# Altium PCB SNA.PcbDoc (part 3 of 6)
Units mm, origin at the board's own origin, x right, y up, seen from the top; angles counter-clockwise.
Board outline 122 x 98 mm, 4 copper layers (L1 Top Layer, L2 Inner 1, L3 Inner 2, L4 Bottom Layer), stack 1.588 mm thick; 466 components, 299 nets, 1366 pads, 4218 vias.
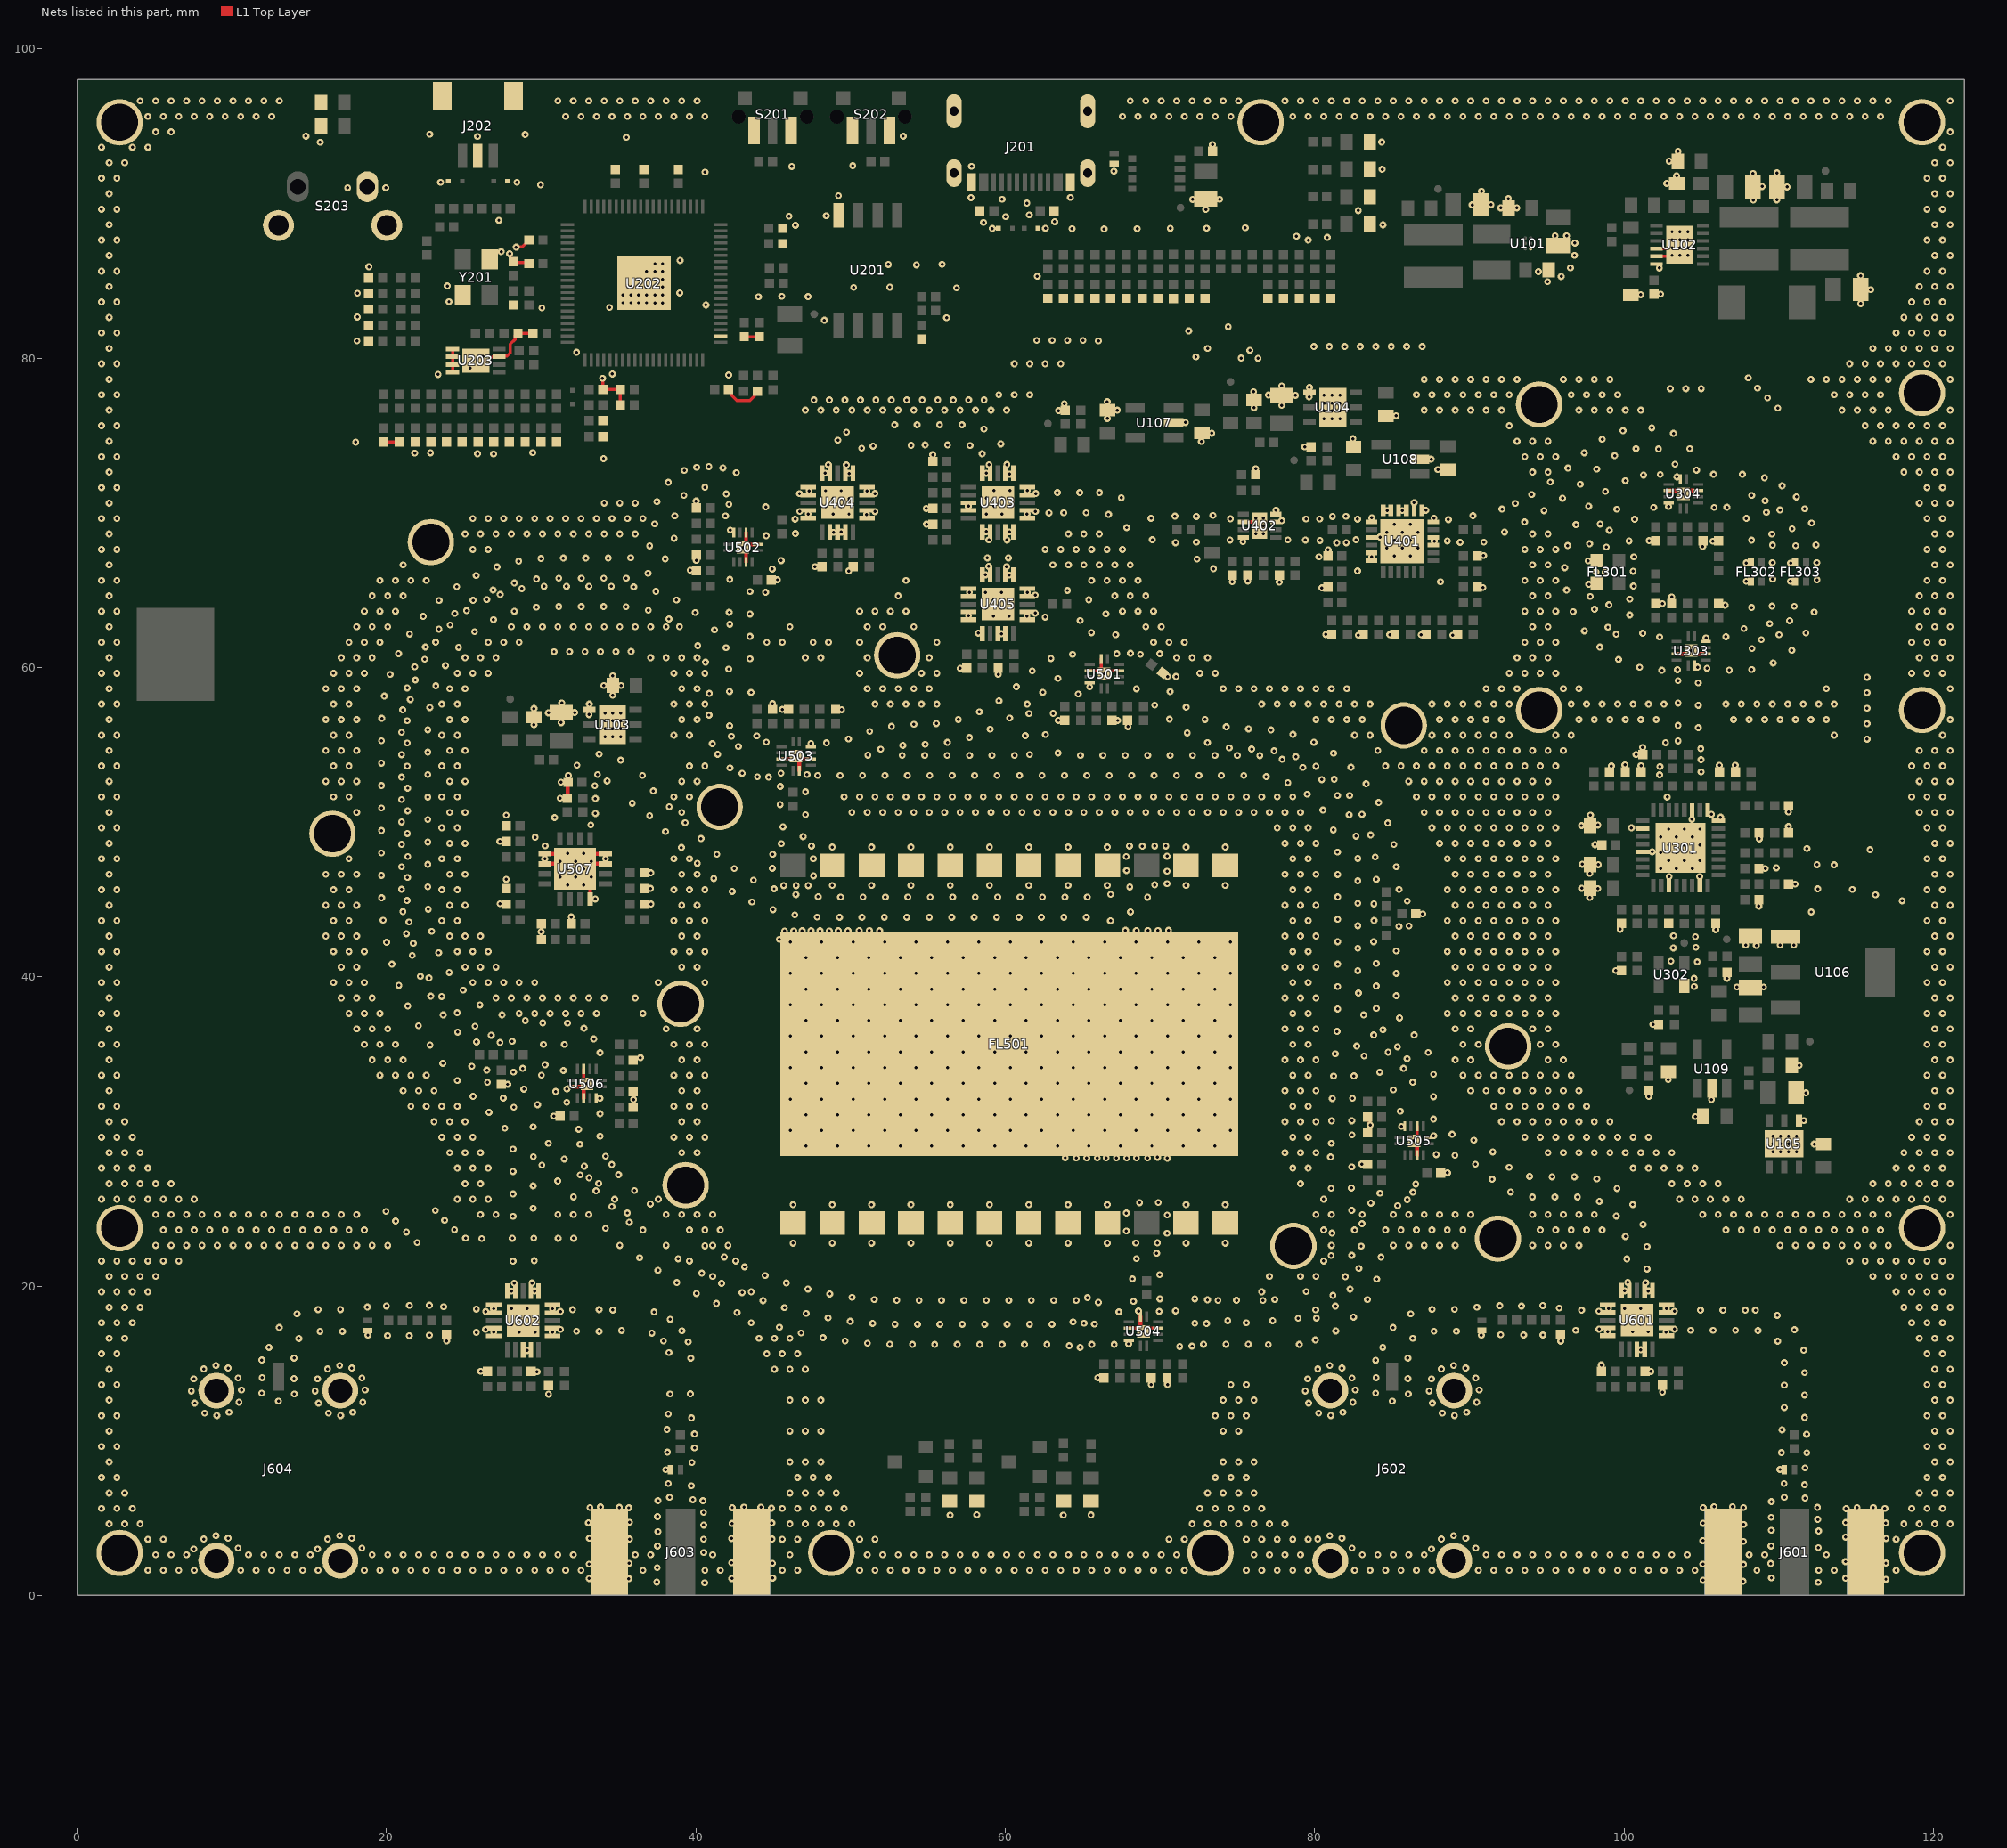
[diagram p5: the nets of this part, all layers, seen from the top]

## Via types
v1: diameter 0.45, hole 0.2, L1 Top Layer to L4 Bottom Layer, tented both sides, 4218 vias

## Nets (pads, with @x,y where several pads share a name; then routed paths per layer and width w, separated by ;. In a path a pad name is that pad's centre, name@x,y a point inside that pad or via, vN(x,y) a via of type N, cw(c..) or ccw(c..) an arc to the next point about the centre after c; other vN are vias at no path point) (continued)
GND: (continued)
  other v1: 40.55,0.82 112.538,0.847 37.467,0.866 107.687,0.914 105.095,0.98 116.91,1.034 33.094,1.093 35.664,1.081 42.32,1.093 114.308,1.114 44.959,1.12 109.512,1.134 4.572,1.625 5.572,1.625 6.572,1.625 7.572,1.625 10.572,1.625 11.572,1.625 12.572,1.625 13.572,1.625 14.572,1.625 15.572,1.625 18.572,1.625 19.572,1.625 20.572,1.625 21.572,1.625 22.572,1.625 23.572,1.625 24.572,1.625 25.572,1.625 26.572,1.625 27.572,1.625 28.572,1.625 29.572,1.625 30.572,1.625 31.572,1.625 32.572,1.625 36.572,1.625 40.572,1.625 41.572,1.625 45.572,1.625 46.572,1.625 50.572,1.625 51.572,1.625 52.572,1.625 53.572,1.625 54.572,1.625 55.572,1.625 56.572,1.625 57.572,1.625 58.572,1.625 59.572,1.625 60.572,1.625 61.572,1.625 62.572,1.625 63.572,1.625 64.572,1.625 65.572,1.625 66.572,1.625 67.572,1.625 68.572,1.625 69.572,1.625 70.572,1.625 71.572,1.625 75.572,1.625 76.572,1.625 77.572,1.625 78.572,1.625 79.572,1.625 82.572,1.625 83.572,1.625 84.572,1.625 85.572,1.625 86.572,1.625 87.572,1.625 90.572,1.625 91.572,1.625 92.572,1.625 93.572,1.625 94.572,1.625 95.572,1.625 96.572,1.625 97.572,1.625 98.572,1.625 99.572,1.625 100.572,1.625 101.572,1.625 102.572,1.625 103.572,1.625 104.572,1.625 108.572,1.625 112.572,1.625 113.572,1.625 117.572,1.625 37.494,1.793 107.713,2.007 33.083,2.027 105.078,2.025 35.67,2.075 44.941,2.074 109.464,2.061 116.91,2.091 42.31,2.112 114.296,2.183 5.072,2.625 6.072,2.625 7.072,2.625 11.072,2.625 12.072,2.625 13.072,2.625 14.072,2.625 15.072,2.625 19.072,2.625 20.072,2.625 21.072,2.625 22.072,2.625 23.072,2.625 24.072,2.625 25.072,2.625 26.072,2.625 27.072,2.625 28.072,2.625 29.072,2.625 30.072,2.625 31.072,2.625 32.072,2.625 36.072,2.625 37.072,2.625 41.072,2.625 46.072,2.625 51.072,2.625 52.072,2.625 53.072,2.625 54.072,2.625 55.072,2.625 56.072,2.625 57.072,2.625 58.072,2.625 59.072,2.625 60.072,2.625 61.072,2.625 62.072,2.625 63.072,2.625 64.072,2.625 65.072,2.625 66.072,2.625 67.072,2.625 68.072,2.625 69.072,2.625 70.072,2.625 71.072,2.625 76.072,2.625 77.072,2.625 78.072,2.625 79.072,2.625 83.072,2.625 84.072,2.625 85.072,2.625 86.072,2.625 87.072,2.625 91.072,2.625 92.072,2.625 93.072,2.625 94.072,2.625 95.072,2.625 96.072,2.625 97.072,2.625 98.072,2.625 99.072,2.625 100.072,2.625 101.072,2.625 102.072,2.625 103.072,2.625 104.072,2.625 108.072,2.625 109.072,2.625 113.072,2.625 40.495,2.775 7.541,3.003 15.541,3.003 87.541,3.003 10.401,3.062 18.401,3.062 82.401,3.062 90.401,3.062 112.545,3.094 37.513,3.197 109.491,3.199 107.703,3.494 105.084,3.538 4.572,3.625 5.572,3.625 45.572,3.625 46.572,3.625 50.572,3.625 51.572,3.625 70.572,3.625 71.572,3.625 75.572,3.625 76.572,3.625 77.572,3.625 78.572,3.625 79.572,3.625 117.572,3.625 8.185,3.648 16.185,3.648 35.699,3.646 40.486,3.638 44.923,3.645 80.185,3.648 88.185,3.648 9.756,3.706 17.756,3.706 33.105,3.692 42.305,3.689 81.756,3.706 89.756,3.706 116.912,3.686 114.307,3.773 8.968,3.865 16.968,3.865 80.968,3.865 88.968,3.865 37.54,4.124 112.563,4.164 109.505,4.208 40.495,4.546 107.725,4.588 2.072,4.625 3.072,4.625 4.072,4.625 46.072,4.625 47.072,4.625 48.072,4.625 49.072,4.625 50.072,4.625 72.072,4.625 73.072,4.625 74.072,4.625 75.072,4.625 76.072,4.625 77.072,4.625 78.072,4.625 118.072,4.625 119.072,4.625 120.072,4.625 121.072,4.625 42.325,4.654 105.09,4.665 33.045,4.691 44.904,4.684 116.898,4.682 114.313,4.709 35.699,4.73 112.511,4.916 109.498,5.046 37.513,5.097 56.43,5.196 63.738,5.19 65.531,5.203 58.153,5.212 40.486,5.363 114.34,5.611 1.572,5.625 2.572,5.625 3.572,5.625 45.572,5.625 46.572,5.625 47.572,5.625 48.572,5.625 49.572,5.625 72.572,5.625 73.572,5.625 74.572,5.625 75.572,5.625 76.572,5.625 116.845,5.624 118.572,5.625 119.572,5.625 120.572,5.625 44.878,5.646 33.148,5.678 35.658,5.667 42.344,5.673 105.101,5.671 107.714,5.682 112.489,5.69 115.054,5.678 116.104,5.678 35.049,5.695 43.101,5.707 44.194,5.701 33.825,5.717 105.802,5.732 106.996,5.732 109.512,6.062 37.54,6.125 40.45,6.125 39.798,6.193 111.686,6.295 38.29,6.342 110.349,6.349 2.072,6.625 3.072,6.625 46.072,6.625 47.072,6.625 48.072,6.625 49.072,6.625 73.072,6.625 74.072,6.625 75.072,6.625 76.072,6.625 119.072,6.625 120.072,6.625 121.072,6.625 39.704,7.096 111.652,7.163 38.21,7.235 110.329,7.238 1.572,7.625 2.572,7.625 46.572,7.625 47.572,7.625 48.572,7.625 73.572,7.625 74.572,7.625 75.572,7.625 119.572,7.625 120.572,7.625 38.039,8.128 110.062,8.143 111.689,8.239 39.742,8.586 2.072,8.625 46.072,8.625 47.072,8.625 48.072,8.625 74.072,8.625 75.072,8.625 76.072,8.625 120.072,8.625 121.072,8.625 111.797,9.221 110.161,9.228 38.155,9.263 39.898,9.541 1.572,9.625 2.572,9.625 119.572,9.625 120.572,9.625 111.791,10.42 39.898,10.444 2.072,10.625 46.072,10.625 47.072,10.625 48.072,10.625 74.072,10.625 75.072,10.625 120.072,10.625 121.072,10.625 110.193,10.714 38.126,10.732 39.71,11.479 111.652,11.508 1.572,11.625 2.572,11.625 9.032,11.629 17.032,11.629 73.572,11.625 74.572,11.625 75.572,11.625 81.032,11.629 89.032,11.629 119.572,11.625 120.572,11.625 38.214,11.725 8.244,11.788 16.244,11.788 80.244,11.788 88.244,11.788 9.815,11.846 17.815,11.846 81.815,11.846 89.815,11.846 110.349,12.149 7.599,12.432 15.599,12.432 79.599,12.432 87.599,12.432 10.459,12.491 18.459,12.491 82.459,12.491 90.459,12.491 13.01,12.557 85.01,12.557 2.072,12.625 46.072,12.625 47.072,12.625 48.072,12.625 74.072,12.625 75.072,12.625 76.072,12.625 120.072,12.625 121.072,12.625 111.652,12.958 14.038,13.02 30.472,13.01 38.319,13.019 86.038,13.02 39.646,13.032 11.927,13.08 83.927,13.08 102.472,13.145 7.382,13.215 15.382,13.215 79.382,13.215 87.382,13.215 10.618,13.279 18.618,13.279 82.618,13.279 90.618,13.279 110.349,13.599 1.572,13.625 2.572,13.625 69.416,13.637 70.476,13.637 74.572,13.625 75.572,13.625 119.572,13.625 120.572,13.625 7.541,14.003 15.541,14.003 79.541,14.003 87.541,14.003 14.014,14.025 86.014,14.025 10.401,14.062 18.401,14.062 82.401,14.062 90.401,14.062 11.957,14.079 65.974,14.075 83.957,14.079 111.652,14.408 29.73,14.458 26.086,14.49 101.727,14.483 2.072,14.625 45.072,14.625 46.072,14.625 47.072,14.625 120.072,14.625 121.072,14.625 8.185,14.648 16.185,14.648 80.185,14.648 88.185,14.648 9.756,14.706 17.756,14.706 81.756,14.706 89.756,14.706 8.968,14.865 16.968,14.865 80.968,14.865 88.968,14.865 98.515,14.901 110.349,15.049 83.934,15.204 11.938,15.22 39.67,15.341 14.016,15.349 86.016,15.349 1.572,15.625 2.572,15.625 44.572,15.625 45.572,15.625 46.572,15.625 119.572,15.625 120.572,15.625 38.248,15.701 29.087,15.834 111.594,15.857 101.06,15.886 12.394,16.036 64.834,16.036 84.391,16.035 71.269,16.09 72.057,16.117 64.121,16.145 53.984,16.225 55.434,16.225 56.884,16.225 58.334,16.225 59.784,16.225 61.234,16.225 62.684,16.225 65.584,16.225 67.034,16.225 76.988,16.216 78.993,16.23 52.534,16.235 72.807,16.237 74.257,16.237 75.707,16.237 67.965,16.261 51.086,16.305 39.502,16.39 109.921,16.434 23.885,16.46 37.901,16.444 49.643,16.447 95.894,16.438 80.034,16.514 14.329,16.608 2.072,16.625 3.072,16.625 44.072,16.625 45.072,16.625 46.072,16.625 86.329,16.62 119.072,16.625 120.072,16.625 121.072,16.625 48.21,16.666 20.062,16.796 21.464,16.796 18.795,16.826 22.769,16.826 90.764,16.818 93.503,16.837 94.742,16.837 92.008,16.852 37.142,16.957 46.791,16.967 25.803,17.007 28.579,17.018 29.595,17.018 26.931,17.021 30.715,17.033 100.541,17.039 101.557,17.039 102.699,17.035 98.924,17.052 15.702,17.074 17.152,17.074 32.286,17.085 33.74,17.071 68.932,17.077 87.702,17.085 89.152,17.085 39.087,17.108 81.358,17.104 35.194,17.129 96.867,17.14 104.294,17.14 105.744,17.14 107.194,17.14 108.644,17.122 111.005,17.182 26.4,17.202 31.236,17.202 98.378,17.218 103.24,17.215 13.058,17.325 45.39,17.34 85.05,17.326 28.071,17.526 29.087,17.526 52.863,17.536 54.313,17.528 55.763,17.528 57.213,17.528 58.663,17.528 60.113,17.528 61.563,17.528 63.013,17.528 65.756,17.541 100.033,17.547 101.049,17.547 51.414,17.59 72.239,17.599 73.002,17.58 1.572,17.625 2.572,17.625 3.572,17.625 43.572,17.625 65.086,17.604 75.572,17.625 118.572,17.625 119.572,17.625 120.572,17.625 64.375,17.686 49.97,17.722 74.37,17.765 77.27,17.765 38.329,17.847 78.924,17.922 80.107,17.931 48.537,17.941 82.505,17.991 28.579,18.034 29.595,18.034 100.541,18.055 101.557,18.055 109.89,18.108 14.211,18.205 86.199,18.21 47.117,18.237 42.653,18.295 37.292,18.329 67.333,18.335 26.405,18.355 31.238,18.358 69.939,18.364 68.603,18.387 98.361,18.375 103.241,18.382 70.999,18.401 34.623,18.452 97.238,18.443 104.93,18.443 106.38,18.443 107.83,18.443 108.479,18.445 15.577,18.486 17.027,18.486 32.023,18.473 33.74,18.478 80.051,18.469 25.803,18.509 87.577,18.498 89.027,18.498 26.917,18.536 28.071,18.542 29.087,18.542 30.732,18.536 102.72,18.54 98.985,18.554 100.033,18.563 101.049,18.563 95.793,18.576 45.716,18.608 2.072,18.625 3.072,18.625 4.072,18.625 90.478,18.633 118.072,18.625 119.072,18.625 120.072,18.625 121.072,18.625 18.764,18.65 23.68,18.67 19.993,18.712 81.333,18.705 93.355,18.709 91.957,18.735 94.735,18.741 21.478,18.754 22.774,18.764 41.324,18.875 66.017,18.945 68.275,19.009 44.336,19.055 52.973,19.074 54.423,19.07 55.873,19.07 57.323,19.07 58.773,19.07 60.223,19.07 61.673,19.07 63.123,19.07 64.573,19.07 73.744,19.069 76.644,19.069 74.938,19.078 73.063,19.104 77.41,19.122 51.524,19.128 83.401,19.131 69.983,19.172 72.243,19.175 65.306,19.252 50.081,19.268 81.167,19.395 48.648,19.495 40.026,19.521 42.983,19.576 1.572,19.625 2.572,19.625 3.572,19.625 4.572,19.625 43.572,19.625 76.572,19.625 117.572,19.625 118.572,19.625 119.572,19.625 120.572,19.625 79.445,19.64 28.079,19.675 29.581,19.685 101.563,19.679 100.029,19.695 47.232,19.807 82.277,19.806 41.659,20.168 28.248,20.188 29.404,20.202 45.838,20.203 38.763,20.234 100.231,20.241 101.389,20.225 68.217,20.466 84.004,20.45 2.072,20.625 3.072,20.625 4.072,20.625 5.072,20.625 41.072,20.625 77.072,20.625 79.072,20.625 80.072,20.625 81.97,20.603 116.072,20.625 117.072,20.625 118.072,20.625 119.072,20.625 120.072,20.625 121.072,20.625 44.469,20.682 69.971,20.734 40.37,20.831 37.545,21.02 101.476,21.105 82.846,21.14 43.132,21.242 28.172,21.611 1.572,21.625 2.572,21.625 3.572,21.625 4.572,21.625 5.572,21.625 6.572,21.625 29.545,21.638 39.572,21.625 42.572,21.625 80.572,21.625 114.572,21.625 115.572,21.625 116.572,21.625 117.572,21.625 118.572,21.625 119.572,21.625 120.572,21.625 38.851,21.763 100.172,21.756 68.476,21.771 36.36,21.832 41.83,21.882 84.28,21.873 81.056,21.979 82.391,21.99 69.78,22.12 101.473,22.555 40.57,22.598 82.995,22.582 5.072,22.625 6.072,22.625 7.072,22.625 8.072,22.625 9.072,22.625 10.072,22.625 11.072,22.625 12.072,22.625 13.072,22.625 14.072,22.625 15.072,22.625 16.072,22.625 17.072,22.625 18.072,22.625 19.072,22.625 20.072,22.625 35.072,22.625 38.072,22.625 41.072,22.625 42.072,22.625 81.072,22.625 85.072,22.625 86.072,22.625 87.072,22.625 88.072,22.625 89.072,22.625 94.072,22.625 95.072,22.625 96.072,22.625 97.072,22.625 110.072,22.625 111.072,22.625 112.072,22.625 113.072,22.625 114.072,22.625 115.072,22.625 116.072,22.625 117.072,22.625 121.072,22.625 46.272,22.777 48.812,22.777 51.352,22.777 53.892,22.777 56.432,22.777 58.972,22.777 61.512,22.777 64.052,22.777 66.592,22.777 68.431,22.782 71.672,22.777 74.212,22.777 69.825,22.791 21.978,22.814 26.153,23.071 25.105,23.101 28.125,23.092 29.517,23.104 31.09,23.093 32.09,23.093 100.073,23.202 70.451,23.417 81.106,23.428 21.281,23.494 67.817,23.559 5.572,23.625 6.572,23.625 7.572,23.625 8.572,23.625 9.572,23.625 10.572,23.625 11.572,23.625 12.572,23.625 13.572,23.625 14.572,23.625 15.572,23.625 16.572,23.625 17.572,23.625 18.572,23.625 24.391,23.64 36.572,23.625 39.572,23.625 40.572,23.625 41.572,23.625 80.572,23.625 82.572,23.625 84.572,23.625 85.572,23.625 86.572,23.625 87.572,23.625 88.572,23.625 89.572,23.625 94.572,23.625 95.572,23.625 96.572,23.625 97.572,23.625 98.572,23.625 106.572,23.625 107.572,23.625 108.572,23.625 109.572,23.625 110.572,23.625 111.572,23.625 112.572,23.625 113.572,23.625 114.572,23.625 115.572,23.625 116.572,23.625 34.149,23.733 101.212,23.982 83.046,24.031 35.692,24.129 20.584,24.202 23.749,24.251 28.172,24.511 99.485,24.527 70.46,24.593 5.072,24.625 6.072,24.625 7.072,24.625 8.072,24.625 9.072,24.625 10.072,24.625 11.072,24.625 12.072,24.625 13.072,24.625 14.072,24.625 15.072,24.625 16.072,24.625 17.072,24.625 18.072,24.625 26.072,24.625 27.072,24.625 31.072,24.625 32.072,24.625 33.072,24.625 38.072,24.625 39.072,24.625 40.072,24.625 41.072,24.625 80.072,24.625 81.072,24.625 83.072,24.625 85.072,24.625 86.072,24.625 87.072,24.625 88.072,24.625 89.072,24.625 90.072,24.625 94.072,24.625 95.072,24.625 96.072,24.625 97.072,24.625 98.072,24.625 105.072,24.625 106.072,24.625 107.072,24.625 108.072,24.625 109.072,24.625 110.072,24.625 111.072,24.625 112.072,24.625 113.072,24.625 114.072,24.625 115.072,24.625 116.072,24.625 117.072,24.625 121.072,24.625 35.56,24.726 67.819,24.724 19.964,24.822 23.156,24.887 82.385,24.89 29.476,25.032 34.566,25.139 85.353,25.197 46.272,25.266 48.812,25.266 51.352,25.266 53.892,25.266 56.432,25.266 58.972,25.266 61.512,25.266 64.052,25.266 66.592,25.266 71.672,25.266 74.212,25.266 100.552,25.273 37.052,25.311 83.624,25.361 68.668,25.389 69.882,25.399 98.39,25.478 85.975,25.593 1.572,25.625 2.572,25.625 3.572,25.625 4.572,25.625 5.572,25.625 6.572,25.625 7.572,25.625 24.572,25.625 25.572,25.625 26.572,25.625 34.736,25.618 37.572,25.625 80.572,25.625 103.572,25.625 104.572,25.625 105.572,25.625 106.572,25.625 107.572,25.625 114.572,25.625 115.572,25.625 116.572,25.625 117.572,25.625 118.572,25.625 119.572,25.625 120.572,25.625 32.085,25.77 94.068,25.762 95.518,25.763 96.968,25.763 28.172,25.961 84.208,26.006 86.339,26.073 92.654,26.083 33.537,26.16 36.021,26.176 99.54,26.311 81.056,26.327 82.366,26.34 29.476,26.482 86.524,26.603 2.072,26.625 3.072,26.625 4.072,26.625 5.072,26.625 6.072,26.625 25.072,26.625 26.072,26.625 33.711,26.644 79.072,26.625 103.072,26.625 104.072,26.625 105.072,26.625 106.072,26.625 116.072,26.625 117.072,26.625 118.072,26.625 119.072,26.625 120.072,26.625 121.072,26.625 31.06,26.795 91.461,26.906 98.227,26.928 33.088,26.996 95.334,27.066 96.784,27.066 93.884,27.091 32.512,27.186 34.996,27.201 88.579,27.318 28.172,27.411 1.572,27.625 2.572,27.625 3.572,27.625 4.572,27.625 24.572,27.625 25.572,27.625 26.572,27.625 78.572,27.625 79.572,27.625 100.572,27.625 101.572,27.625 102.572,27.625 103.572,27.625 104.572,27.625 117.572,27.625 118.572,27.625 119.572,27.625 120.572,27.625 92.557,27.675 82.383,27.704 32.779,27.755 30.034,27.82 34.553,27.863 83.029,27.887 90.385,27.879 31.486,28.211 70.471,28.269 63.866,28.296 64.571,28.284 65.256,28.281 65.935,28.279 66.509,28.292 67.172,28.293 67.836,28.286 68.472,28.294 69.186,28.286 69.835,28.328 29.491,28.367 81.013,28.348 34.149,28.4 89.054,28.452 87.844,28.501 2.072,28.625 3.072,28.625 4.072,28.625 24.072,28.625 25.072,28.625 26.072,28.625 39.072,28.625 40.072,28.625 78.072,28.625 79.072,28.625 80.072,28.625 95.072,28.625 96.072,28.625 97.072,28.625 98.072,28.625 99.072,28.625 100.072,28.625 101.072,28.625 102.072,28.625 103.072,28.625 118.072,28.625 119.072,28.625 120.072,28.625 121.072,28.625 91.505,28.673 109.603,28.682 110.111,28.682 110.619,28.682 111.127,28.682 28.172,28.861 47.112,29.046 49.144,29.046 51.176,29.046 53.208,29.046 55.24,29.046 57.272,29.046 59.304,29.046 61.336,29.046 63.368,29.046 65.4,29.046 67.432,29.046 69.464,29.046 71.496,29.046 73.528,29.046 32.499,29.177 109.603,29.19 110.111,29.19 110.619,29.19 111.127,29.19 112.276,29.186 30.461,29.236 81.066,29.227 86.416,29.405 90.273,29.437 1.572,29.625 2.572,29.625 3.572,29.625 23.572,29.625 24.572,29.625 25.572,29.625 38.572,29.625 39.572,29.625 40.572,29.625 78.572,29.625 79.572,29.625 93.572,29.625 94.572,29.625 95.572,29.625 96.572,29.625 97.572,29.625 98.572,29.625 99.572,29.625 100.572,29.625 101.572,29.625 118.572,29.625 119.572,29.625 120.572,29.625 33.802,29.69 109.603,29.698 110.111,29.698 110.619,29.698 111.127,29.698 87.686,29.722 82.406,29.778 88.873,29.816 46.096,30.062 48.128,30.062 50.16,30.062 52.192,30.062 54.224,30.062 56.256,30.062 58.288,30.062 60.32,30.062 62.352,30.062 64.384,30.062 66.416,30.062 68.448,30.062 70.48,30.062 72.512,30.062 74.544,30.062 32.414,30.14 27.644,30.211 29.476,30.3 85.606,30.331 2.072,30.625 3.072,30.625 23.072,30.625 24.072,30.625 25.072,30.625 39.072,30.625 40.072,30.625 78.072,30.625 79.072,30.625 80.072,30.625 92.072,30.625 93.072,30.625 94.072,30.625 95.072,30.625 96.072,30.625 97.072,30.625 98.072,30.625 99.072,30.625 119.072,30.625 120.072,30.625 121.072,30.625 81.086,30.677 82.396,30.689 111.604,30.696 87.669,30.799 104.596,30.956 30.808,30.988 47.112,31.078 49.144,31.078 51.176,31.078 53.208,31.078 55.24,31.078 57.272,31.078 59.304,31.078 61.336,31.078 63.368,31.078 65.4,31.078 67.432,31.078 69.464,31.078 71.496,31.078 73.528,31.078 33.802,31.14 26.618,31.236 85.528,31.307 28.225,31.566 1.572,31.625 2.572,31.625 21.572,31.625 22.572,31.625 23.572,31.625 24.572,31.625 38.572,31.625 39.572,31.625 40.572,31.625 78.572,31.625 79.572,31.625 91.572,31.625 92.572,31.625 93.572,31.625 94.572,31.625 95.572,31.625 96.572,31.625 97.572,31.625 119.572,31.625 120.572,31.625 29.755,31.723 31.647,31.88 105.644,32.067 46.096,32.094 48.128,32.094 50.16,32.094 52.192,32.094 54.224,32.094 56.256,32.094 58.288,32.094 60.32,32.094 62.352,32.094 64.384,32.094 66.416,32.094 68.448,32.094 70.48,32.094 72.512,32.094 74.544,32.094 81.128,32.126 27.544,32.153 33.788,32.142 82.438,32.139 87.669,32.249 25.593,32.261 101.593,32.263 111.743,32.497 30.927,32.577 2.072,32.625 21.072,32.625 22.072,32.625 23.072,32.625 39.072,32.625 40.072,32.625 78.072,32.625 79.072,32.625 80.072,32.625 90.072,32.625 91.072,32.625 92.072,32.625 93.072,32.625 94.072,32.625 95.072,32.625 96.072,32.625 97.072,32.625 120.072,32.625 121.072,32.625 85.077,32.685 28.871,32.737 31.66,32.746 27.833,33.046 47.112,33.11 49.144,33.11 51.176,33.11 53.208,33.11 55.24,33.11 57.272,33.11 59.304,33.11 61.336,33.11 63.368,33.11 65.4,33.11 67.432,33.11 69.464,33.11 71.496,33.11 73.528,33.11 26.519,33.179 86.329,33.182 24.576,33.295 102.85,33.353 81.215,33.574 82.528,33.586 1.572,33.625 2.572,33.625 19.572,33.625 20.572,33.625 21.572,33.625 22.572,33.625 38.572,33.625 39.572,33.625 40.572,33.625 78.572,33.625 79.572,33.625 89.572,33.625 90.572,33.625 91.572,33.625 92.572,33.625 93.572,33.625 94.572,33.625 95.572,33.625 96.572,33.625 119.572,33.625 120.572,33.625 30.009,33.636 87.672,33.699 84.188,33.831 28.202,33.837 31.427,33.938 26.486,33.966 28.803,34.077 85.737,34.076 46.096,34.126 48.128,34.126 50.16,34.126 52.192,34.126 54.224,34.126 56.256,34.126 58.288,34.126 60.32,34.126 62.352,34.126 64.384,34.126 66.416,34.126 68.448,34.126 70.48,34.126 72.512,34.126 74.544,34.126 25.507,34.217 111.308,34.269 30.247,34.311 23.638,34.401 2.072,34.625 19.072,34.625 20.072,34.625 21.072,34.625 39.072,34.625 40.072,34.625 78.072,34.625 79.072,34.625 80.072,34.625 89.072,34.625 90.072,34.625 95.072,34.625 96.072,34.625 120.072,34.625 121.072,34.625 85.97,34.702 36.41,34.766 83.185,34.878 81.319,35.02 33.802,35.09 84.736,35.125 87.327,35.107 47.112,35.142 49.144,35.142 51.176,35.142 53.208,35.142 55.24,35.142 57.272,35.142 59.304,35.142 61.336,35.142 63.368,35.142 65.4,35.142 67.432,35.142 69.464,35.142 71.496,35.142 73.528,35.142 85.344,35.471 82.711,35.518 22.806,35.589 1.572,35.625 2.572,35.625 18.572,35.625 19.572,35.625 20.572,35.625 30.142,35.628 31.493,35.622 38.572,35.625 39.572,35.625 40.572,35.625 78.572,35.625 79.572,35.625 89.572,35.625 90.572,35.625 94.572,35.625 95.572,35.625 119.572,35.625 120.572,35.625 27.328,35.744 25.818,35.786 28.113,35.828 33.394,35.979 46.096,36.158 48.128,36.158 50.16,36.158 52.192,36.158 54.224,36.158 56.256,36.158 58.288,36.158 60.32,36.158 62.352,36.158 64.384,36.158 66.416,36.158 68.448,36.158 70.48,36.158 72.512,36.158 74.544,36.158 26.762,36.222 83.809,36.24 86.42,36.239 24.59,36.422 81.439,36.465 84.399,36.571 2.072,36.625 18.072,36.625 19.072,36.625 20.072,36.625 38.072,36.625 40.072,36.625 78.072,36.625 79.072,36.625 80.072,36.625 89.072,36.625 90.072,36.625 94.072,36.625 95.072,36.625 120.072,36.625 121.072,36.625 32.76,36.674 25.718,36.8 22.059,36.831 101.856,36.919 31.694,37.006 30.089,37.018 28.973,37.169 47.112,37.174 49.144,37.174 51.176,37.174 53.208,37.174 55.24,37.174 57.272,37.174 59.304,37.174 61.336,37.174 63.368,37.174 65.4,37.174 67.432,37.174 69.464,37.174 71.496,37.174 73.528,37.174 85.473,37.337 23.658,37.533 27.465,37.536 83.156,37.535 1.572,37.625 2.572,37.625 17.572,37.625 18.572,37.625 19.572,37.625 28.572,37.625 29.572,37.625 30.572,37.625 31.572,37.625 32.572,37.625 33.572,37.625 36.572,37.625 78.572,37.625 79.572,37.625 88.572,37.625 89.572,37.625 90.572,37.625 91.572,37.625 92.572,37.625 93.572,37.625 94.572,37.625 95.572,37.625 119.572,37.625 120.572,37.625 24.566,37.68 81.477,37.915 83.976,37.958 21.376,38.11 26.034,38.176 46.096,38.19 48.128,38.19 50.16,38.19 52.192,38.19 54.224,38.19 56.256,38.19 58.288,38.19 60.32,38.19 62.352,38.19 64.384,38.19 66.416,38.19 68.448,38.19 70.48,38.19 72.512,38.19 74.544,38.19 2.072,38.625 17.072,38.625 18.072,38.625 19.072,38.625 27.072,38.625 28.072,38.625 29.072,38.625 30.072,38.625 31.072,38.625 32.072,38.625 33.072,38.625 34.072,38.625 36.072,38.625 78.072,38.625 79.072,38.625 80.072,38.625 89.072,38.625 90.072,38.625 91.072,38.625 92.072,38.625 93.072,38.625 94.072,38.625 95.072,38.625 120.072,38.625 121.072,38.625 23.562,38.726 22.856,38.74 85.269,38.772 82.822,38.946 24.95,39.139 47.112,39.206 49.144,39.206 51.176,39.206 53.208,39.206 55.24,39.206 57.272,39.206 59.304,39.206 61.336,39.206 63.368,39.206 65.4,39.206 67.432,39.206 69.464,39.206 71.496,39.206 73.528,39.206 107.292,39.333 109.009,39.333 81.477,39.365 104.528,39.365 83.966,39.408 20.799,39.441 1.572,39.625 2.572,39.625 16.572,39.625 17.572,39.625 18.572,39.625 25.572,39.625 26.572,39.625 27.572,39.625 28.572,39.625 29.572,39.625 37.572,39.625 40.572,39.625 78.572,39.625 79.572,39.625 88.572,39.625 89.572,39.625 90.572,39.625 91.572,39.625 92.572,39.625 93.572,39.625 94.572,39.625 95.572,39.625 119.572,39.625 120.572,39.625 104.519,39.895 106.634,39.899 22.74,39.921 22.189,40.028 46.096,40.222 48.128,40.222 50.16,40.222 52.192,40.222 54.224,40.222 56.256,40.222 58.288,40.222 60.32,40.222 62.352,40.222 64.384,40.222 66.416,40.222 68.448,40.222 70.48,40.222 72.512,40.222 74.544,40.222 85.269,40.222 24.053,40.279 82.782,40.395 99.45,40.403 2.072,40.625 17.072,40.625 18.072,40.625 25.072,40.625 26.072,40.625 27.072,40.625 39.072,40.625 40.072,40.625 78.072,40.625 79.072,40.625 80.072,40.625 89.072,40.625 90.072,40.625 91.072,40.625 92.072,40.625 93.072,40.625 94.072,40.625 95.072,40.625 120.072,40.625 121.072,40.625 20.34,40.816 81.477,40.815 83.966,40.858 104.719,40.963 103.017,41.005 47.112,41.238 49.144,41.238 51.176,41.238 53.208,41.238 55.24,41.238 57.272,41.238 59.304,41.238 61.336,41.238 63.368,41.238 65.4,41.238 67.432,41.238 69.464,41.238 71.496,41.238 73.528,41.238 21.654,41.376 23.368,41.557 1.572,41.625 2.572,41.625 16.572,41.625 17.572,41.625 18.572,41.625 24.572,41.625 25.572,41.625 26.572,41.625 38.572,41.625 39.572,41.625 40.572,41.625 78.572,41.625 79.572,41.625 88.572,41.625 89.572,41.625 90.572,41.625 91.572,41.625 92.572,41.625 93.572,41.625 94.572,41.625 95.572,41.625 119.572,41.625 120.572,41.625 85.269,41.672 82.782,41.845 103.173,41.861 104.63,41.901 108.537,42.024 107.848,42.039 110.074,42.04 110.97,42.04 21.73,42.159 20.002,42.226 46.096,42.254 48.128,42.254 50.16,42.254 52.192,42.254 54.224,42.254 56.256,42.254 58.288,42.254 60.32,42.254 62.352,42.254 64.384,42.254 66.416,42.254 68.448,42.254 70.48,42.254 72.512,42.254 74.544,42.254 81.477,42.265 83.794,42.259 45.389,42.418 104.599,42.588 2.072,42.625 16.072,42.625 17.072,42.625 18.072,42.625 24.072,42.625 25.072,42.625 26.072,42.625 39.072,42.625 40.072,42.625 78.072,42.625 79.072,42.625 80.072,42.625 89.072,42.625 90.072,42.625 91.072,42.625 92.072,42.625 93.072,42.625 94.072,42.625 95.072,42.625 103.181,42.644 120.072,42.625 121.072,42.625 21.28,42.777 22.914,42.933 45.729,42.959 46.326,42.968 46.858,42.976 47.432,42.977 48.016,42.977 48.611,42.966 49.198,42.977 49.827,42.973 51.866,42.976 50.541,42.987 51.203,42.993 67.761,43.001 68.465,42.986 69.206,42.993 69.866,42.993 70.547,43.001 105.914,43.04 99.734,43.074 85.441,43.248 86.093,43.276 82.782,43.295 21.445,43.538 1.572,43.625 2.572,43.625 16.572,43.625 17.572,43.625 23.572,43.625 24.572,43.625 38.572,43.625 39.572,43.625 40.572,43.625 66.789,43.621 78.572,43.625 79.572,43.625 83.826,43.635 88.572,43.625 89.572,43.625 90.572,43.625 91.572,43.625 92.572,43.625 93.572,43.625 94.572,43.625 95.572,43.625 119.572,43.625 120.572,43.625 19.781,43.659 81.477,43.715 47.829,43.86 49.279,43.85 50.729,43.85 52.179,43.85 53.629,43.85 55.079,43.85 56.529,43.85 57.979,43.85 59.429,43.85 60.879,43.85 62.329,43.85 63.779,43.85 65.229,43.85 31.932,43.869 46.386,44 86.964,44.063 68.087,44.196 112.089,44.188 21.053,44.209 44.975,44.335 22.694,44.367 108.702,44.571 2.072,44.625 16.072,44.625 17.072,44.625 18.072,44.625 24.072,44.625 25.072,44.625 39.072,44.625 40.072,44.625 78.072,44.625 79.072,44.625 80.072,44.625 89.072,44.625 90.072,44.625 91.072,44.625 92.072,44.625 93.072,44.625 94.072,44.625 95.072,44.625 120.072,44.625 121.072,44.625 37.085,44.704 27.333,44.724 83.817,44.711 82.782,44.745 43.615,44.839 85.97,44.891 117.956,44.912 21.323,44.935 33.493,45.028 19.678,45.105 97.772,45.12 49.345,45.153 50.795,45.153 52.245,45.153 53.695,45.153 55.145,45.153 56.595,45.153 58.045,45.153 59.495,45.153 60.945,45.153 62.395,45.153 63.845,45.153 65.295,45.153 69.187,45.14 47.896,45.168 81.477,45.165 116.242,45.297 46.453,45.319 66.807,45.326 42.335,45.52 1.572,45.625 2.572,45.625 16.572,45.625 17.572,45.625 23.572,45.625 24.572,45.625 38.572,45.625 39.572,45.625 40.572,45.625 78.572,45.625 79.572,45.625 88.572,45.625 89.572,45.625 90.572,45.625 91.572,45.625 92.572,45.625 93.572,45.625 94.572,45.625 95.572,45.625 119.572,45.625 120.572,45.625 20.972,45.656 85.446,45.645 114.746,45.645 45.05,45.685 112.51,45.684 37.065,45.707 97.252,45.716 98.286,45.696 22.667,45.816 68.044,45.808 45.672,45.896 46.477,45.896 47.255,45.896 48.812,45.897 51.352,45.897 53.892,45.897 56.432,45.897 58.972,45.897 61.512,45.897 64.052,45.897 66.592,45.897 71.672,45.897 74.212,45.897 31.715,45.941 32.731,45.941 69.656,45.94 111.038,45.987 70.45,46.019 82.782,46.195 43.713,46.245 27.735,46.291 83.966,46.293 41.15,46.355 21.352,46.424 31.207,46.449 32.223,46.449 33.239,46.449 47.6,46.527 19.668,46.555 2.072,46.625 16.072,46.625 17.072,46.625 18.072,46.625 24.072,46.625 25.072,46.625 39.072,46.625 40.072,46.625 78.072,46.625 79.072,46.625 80.072,46.625 81.477,46.615 89.072,46.625 90.072,46.625 91.072,46.625 92.072,46.625 93.072,46.625 94.072,46.625 95.072,46.625 120.072,46.625 121.072,46.625 97.772,46.676 37.08,46.72 70.45,46.822 67.826,46.865 31.715,46.957 32.731,46.957 42.473,46.996 44.932,47.015 102.355,47.003 103.371,47.003 104.387,47.003 109.114,46.996 109.835,47.042 20.972,47.106 85.262,47.108 98.321,47.244 112.457,47.241 113.571,47.237 22.667,47.266 97.286,47.272 40.081,47.335 32.223,47.465 102.863,47.511 103.879,47.511 104.895,47.511 1.572,47.625 2.572,47.625 17.572,47.625 23.572,47.625 24.572,47.625 30.229,47.622 38.572,47.625 39.572,47.625 78.572,47.625 79.572,47.625 88.572,47.625 89.572,47.625 90.572,47.625 91.572,47.625 92.572,47.625 93.572,47.625 94.572,47.625 95.572,47.625 119.572,47.625 120.572,47.625 34.148,47.629 47.585,47.627 82.782,47.645 83.904,47.742 21.37,47.769 67.81,47.769 70.445,47.788 41.353,47.918 44.961,47.922 31.715,47.973 32.731,47.973 19.668,48.005 102.355,48.019 103.371,48.019 104.387,48.019 81.467,48.064 115.884,48.214 111.811,48.293 39.056,48.36 48.812,48.386 51.352,48.386 53.892,48.386 56.432,48.386 58.972,48.386 61.512,48.386 64.052,48.386 66.592,48.386 71.672,48.386 74.212,48.386 30.252,48.459 47.464,48.453 68.02,48.456 68.852,48.448 69.653,48.456 70.366,48.457 98.11,48.54 102.863,48.527 103.879,48.527 104.895,48.527 20.972,48.556 85.108,48.55 45.518,48.611 2.072,48.625 24.072,48.625 25.072,48.625 78.072,48.625 79.072,48.625 80.072,48.625 88.072,48.625 89.072,48.625 90.072,48.625 91.072,48.625 92.072,48.625 93.072,48.625 94.072,48.625 95.072,48.625 120.072,48.625 121.072,48.625 22.667,48.716 27.323,48.756 40.322,48.937 29.606,49.023 102.355,49.035 103.371,49.035 104.387,49.035 46.924,49.057 82.662,49.09 83.605,49.161 21.346,49.259 38.03,49.385 19.668,49.455 81.198,49.489 102.863,49.543 103.879,49.543 104.895,49.543 1.572,49.625 2.572,49.625 23.572,49.625 24.572,49.625 77.572,49.625 78.572,49.625 79.572,49.625 87.572,49.625 88.572,49.625 89.572,49.625 90.572,49.625 91.572,49.625 92.572,49.625 93.572,49.625 94.572,49.625 95.572,49.625 100.463,49.628 119.572,49.625 120.572,49.625 45.621,49.692 110.61,49.715 97.244,49.773 98.3,49.804 33.2,49.814 39.297,49.962 84.715,49.945 20.972,50.006 22.667,50.166 30.865,50.291 106.225,50.317 37.005,50.41 27.732,50.451 82.218,50.471 97.817,50.447 47.078,50.476 83.049,50.5 105.639,50.497 33.503,50.558 2.072,50.625 18.072,50.625 24.072,50.625 25.072,50.625 39.072,50.625 50.072,50.625 51.072,50.625 52.072,50.625 53.072,50.625 54.072,50.625 55.072,50.625 56.072,50.625 57.072,50.625 58.072,50.625 59.072,50.625 60.072,50.625 61.072,50.625 62.072,50.625 63.072,50.625 64.072,50.625 65.072,50.625 66.072,50.625 67.072,50.625 68.072,50.625 69.072,50.625 70.072,50.625 71.072,50.625 72.072,50.625 73.072,50.625 74.072,50.625 75.072,50.625 76.072,50.625 77.072,50.625 78.072,50.625 79.072,50.625 87.072,50.625 88.072,50.625 89.072,50.625 90.072,50.625 91.072,50.625 92.072,50.625 93.072,50.625 94.072,50.625 95.072,50.625 110.61,50.648 119.072,50.625 120.072,50.625 121.072,50.625 21.358,50.725 80.527,50.774 19.668,50.905 38.271,50.987 45.44,51.131 35.885,51.218 84.121,51.268 20.972,51.456 33.503,51.527 31.218,51.548 1.572,51.625 2.572,51.625 16.572,51.625 17.572,51.625 22.667,51.616 23.572,51.625 24.572,51.625 38.572,51.625 39.572,51.625 49.572,51.625 50.572,51.625 51.572,51.625 52.572,51.625 53.572,51.625 54.572,51.625 55.572,51.625 56.572,51.625 57.572,51.625 58.572,51.625 59.572,51.625 60.572,51.625 61.572,51.625 62.572,51.625 63.572,51.625 64.572,51.625 65.572,51.625 66.572,51.625 67.572,51.625 68.572,51.625 69.572,51.625 70.572,51.625 71.572,51.625 72.572,51.625 73.572,51.625 74.572,51.625 75.572,51.625 76.572,51.625 77.572,51.625 78.572,51.625 86.572,51.625 87.572,51.625 88.572,51.625 89.572,51.625 90.572,51.625 91.572,51.625 92.572,51.625 93.572,51.625 94.572,51.625 95.572,51.625 102.778,51.624 118.572,51.625 119.572,51.625 120.572,51.625 81.468,51.711 82.254,51.713 79.508,51.807 47.082,51.961 37.246,52.013 21.358,52.192 45.448,52.307 19.668,52.355 33.465,52.355 83.319,52.476 78.256,52.538 31.271,52.578 2.072,52.625 16.072,52.625 17.072,52.625 18.072,52.625 24.072,52.625 25.072,52.625 39.072,52.625 40.072,52.625 86.072,52.625 87.072,52.625 88.072,52.625 89.072,52.625 90.072,52.625 91.072,52.625 92.072,52.625 93.072,52.625 94.072,52.625 95.072,52.625 119.072,52.625 120.072,52.625 121.072,52.625 34.258,52.661 80.447,52.741 81.253,52.761 20.972,52.906 44.688,52.905 43.974,52.923 76.862,52.936 31.757,53.01 47.864,53.009 49.314,53.009 50.764,53.009 52.214,53.009 53.664,53.009 55.114,53.009 56.564,53.009 58.014,53.009 59.464,53.009 60.914,53.009 62.364,53.009 63.814,53.009 65.264,53.009 66.714,53.009 68.164,53.009 69.614,53.009 71.064,53.009 72.514,53.009 73.964,53.009 75.414,53.009 36.54,53.017 102.289,53.049 22.667,53.066 33.639,53.072 47.177,53.074 42.979,53.145 45.492,53.158 104.964,53.237 42.199,53.505 79.231,53.532 82.339,53.544 102.308,53.585 21.335,53.618 80.077,53.61 1.572,53.625 2.572,53.625 16.572,53.625 17.572,53.625 23.572,53.625 24.572,53.625 39.572,53.625 40.572,53.625 84.572,53.625 85.572,53.625 86.572,53.625 87.572,53.625 88.572,53.625 89.572,53.625 90.572,53.625 91.572,53.625 92.572,53.625 93.572,53.625 94.572,53.625 95.572,53.625 99.173,53.627 101.081,53.641 118.572,53.625 119.572,53.625 120.572,53.625 106.151,53.664 107.173,53.669 32.312,53.671 100.046,53.694 19.668,53.805 35.137,54.001 104.964,54.031 77.88,54.058 78.766,54.23 46.472,54.267 76.45,54.298 51.109,54.327 53.331,54.313 54.781,54.313 56.231,54.313 57.681,54.313 59.131,54.313 60.581,54.313 64.85,54.313 66.3,54.313 67.75,54.313 69.2,54.313 70.65,54.313 72.1,54.313 73.55,54.313 75,54.313 20.972,54.356 41.401,54.38 61.56,54.366 100.761,54.362 33.741,54.395 81.209,54.454 63.408,54.467 22.667,54.516 77.365,54.603 2.072,54.625 16.072,54.625 17.072,54.625 18.072,54.625 24.072,54.625 25.072,54.625 84.072,54.625 87.072,54.625 88.072,54.625 89.072,54.625 90.072,54.625 91.072,54.625 92.072,54.625 93.072,54.625 94.072,54.625 95.072,54.625 96.072,54.625 119.072,54.625 120.072,54.625 121.072,54.625 51.936,54.705 75.92,54.72 104.952,54.745 74.472,54.796 101.182,54.83 42.744,54.886 53.363,54.962 54.811,55.026 41.051,55.07 47.423,55.084 21.335,55.119 48.432,55.12 73.064,55.142 102.671,55.131 56.256,55.151 79.943,55.159 44.545,55.171 19.668,55.255 103.479,55.251 115.695,55.362 49.859,55.378 57.671,55.469 34.113,55.528 34.621,55.528 35.129,55.528 42.289,55.545 43.929,55.572 61.28,55.583 1.572,55.625 2.572,55.625 16.572,55.625 17.572,55.625 23.572,55.625 24.572,55.625 38.572,55.625 39.572,55.625 82.572,55.625 83.572,55.625 87.572,55.625 88.572,55.625 89.572,55.625 90.572,55.625 91.572,55.625 92.572,55.625 95.572,55.625 96.572,55.625 113.572,55.625 120.572,55.625 62.589,55.663 78.586,55.671 71.756,55.768 20.972,55.806 51.225,55.865 77.164,55.956 22.667,55.966 59.017,56.007 75.716,56.024 34.113,56.036 34.621,56.036 35.129,56.036 104.785,56.104 74.272,56.159 67.922,56.166 52.638,56.188 42.179,56.224 103.482,56.242 29.526,56.291 54.082,56.325 115.695,56.362 55.531,56.373 31.287,56.427 21.335,56.551 34.113,56.544 34.621,56.544 35.129,56.544 63.419,56.569 67.252,56.567 2.072,56.625 16.072,56.625 17.072,56.625 18.072,56.625 24.072,56.625 25.072,56.625 39.072,56.625 40.072,56.625 56.957,56.634 72.901,56.632 80.072,56.625 81.072,56.625 82.072,56.625 83.072,56.625 88.072,56.625 89.072,56.625 90.072,56.625 91.072,56.625 92.072,56.625 97.072,56.625 98.072,56.625 99.072,56.625 100.072,56.625 101.072,56.625 102.072,56.625 107.072,56.625 108.072,56.625 109.072,56.625 110.072,56.625 111.072,56.625 112.072,56.625 113.072,56.625 121.072,56.625 70.601,56.645 19.688,56.705 60.279,56.721 40.842,56.913 33.088,56.943 61.522,57.013 63.088,57.024 30.458,57.063 34.113,57.052 34.621,57.052 35.129,57.052 32.159,57.082 58.321,57.127 21.047,57.254 49.417,57.263 45.582,57.285 29.531,57.341 115.695,57.362 22.802,57.41 71.69,57.429 104.785,57.554 69.649,57.56 1.572,57.625 2.572,57.625 16.572,57.625 17.572,57.625 23.572,57.625 24.572,57.625 33.103,57.625 38.572,57.625 39.572,57.625 40.572,57.625 51.572,57.625 52.572,57.625 53.572,57.625 54.572,57.625 55.572,57.625 61.412,57.626 76.572,57.625 77.572,57.625 78.572,57.625 79.572,57.625 80.572,57.625 81.572,57.625 82.572,57.625 83.572,57.625 87.572,57.625 88.572,57.625 89.572,57.625 90.572,57.625 91.572,57.625 92.572,57.625 96.572,57.625 97.572,57.625 98.572,57.625 99.572,57.625 100.572,57.625 101.572,57.625 102.572,57.625 106.572,57.625 107.572,57.625 108.572,57.625 109.572,57.625 110.572,57.625 111.572,57.625 112.572,57.625 113.572,57.625 44.949,57.658 31.32,57.708 103.482,57.692 59.585,57.837 21.533,57.924 19.856,58.146 34.619,58.196 64.705,58.28 40.863,58.323 115.695,58.362 43.558,58.381 62.418,58.387 42.167,58.44 70.645,58.434 68.476,58.616 2.072,58.625 16.072,58.625 17.072,58.625 18.072,58.625 24.072,58.625 25.072,58.625 39.072,58.625 40.072,58.625 51.072,58.625 52.072,58.625 53.072,58.625 54.072,58.625 55.072,58.625 74.072,58.625 75.072,58.625 76.072,58.625 77.072,58.625 78.072,58.625 79.072,58.625 80.072,58.625 81.072,58.625 82.072,58.625 91.072,58.625 92.072,58.625 93.072,58.625 96.072,58.625 97.072,58.625 113.072,58.625 121.072,58.625 21.329,58.677 65.447,58.738 60.707,58.755 23.188,58.808 34.044,58.833 35.149,58.833 104.785,59.004 103.482,59.142 21.859,59.187 63.391,59.285 115.695,59.362 70.475,59.416 71.022,59.414 34.625,59.458 20.226,59.548 59.534,59.549 1.572,59.625 2.572,59.625 16.572,59.625 17.572,59.625 18.572,59.625 24.572,59.625 25.572,59.625 26.572,59.625 38.572,59.625 39.572,59.625 40.572,59.625 50.572,59.625 54.572,59.625 55.572,59.625 72.572,59.625 73.572,59.625 92.572,59.625 93.572,59.625 94.572,59.625 95.572,59.625 118.572,59.625 119.572,59.625 120.572,59.625 61.732,59.78 102.431,59.819 106.794,59.825 103.443,59.858 108.243,59.867 42.114,59.889 57.084,59.942 105.348,59.938 100.993,60.003 104.738,60.017 21.821,60.041 23.811,60.117 109.631,60.289 40.613,60.332 99.635,60.512 22.464,60.531 43.487,60.556 62.946,60.574 2.072,60.625 17.072,60.625 18.072,60.625 19.072,60.625 25.072,60.625 26.072,60.625 27.072,60.625 37.072,60.625 38.072,60.625 39.072,60.625 40.072,60.625 47.072,60.625 48.072,60.625 51.072,60.625 55.072,60.625 71.072,60.625 72.072,60.625 73.072,60.625 93.072,60.625 94.072,60.625 95.072,60.625 119.072,60.625 120.072,60.625 121.072,60.625 64.341,60.842 68.726,60.847 67.208,60.878 20.774,60.89 69.976,60.887 68.085,60.915 30.829,61.016 31.829,61.016 32.829,61.016 33.829,61.016 34.829,61.016 35.806,61.023 110.834,61.097 108.256,61.214 41.941,61.274 24.654,61.297 98.425,61.31 22.509,61.317 40.112,61.398 1.572,61.625 2.572,61.625 17.572,61.625 18.572,61.625 19.572,61.625 23.174,61.631 26.572,61.625 27.572,61.625 28.572,61.625 44.572,61.625 45.572,61.625 47.572,61.625 48.572,61.625 50.572,61.625 55.572,61.625 69.572,61.625 70.572,61.625 71.572,61.625 93.572,61.625 94.572,61.625 95.572,61.625 118.572,61.625 119.572,61.625 120.572,61.625 108.863,61.791 105.285,61.906 102.288,61.968 106.571,61.982 43.487,62.006 88.909,62.077 82.813,62.083 67.125,62.113 84.845,62.123 86.877,62.113 110.008,62.112 21.483,62.154 80.709,62.133 99.477,62.151 59.748,62.18 58.253,62.214 101.199,62.208 111.746,62.224 65.568,62.243 25.69,62.312 97.422,62.358 41.201,62.428 23.384,62.473 107.737,62.511 98.945,62.596 2.072,62.625 18.072,62.625 19.072,62.625 20.072,62.625 28.072,62.625 29.072,62.625 30.072,62.625 31.072,62.625 32.072,62.625 33.072,62.625 34.072,62.625 35.072,62.625 36.072,62.625 37.072,62.625 38.072,62.625 38.938,62.636 46.072,62.625 51.072,62.625 52.072,62.625 54.072,62.625 69.072,62.625 70.072,62.625 94.072,62.625 95.072,62.625 119.072,62.625 120.072,62.625 121.072,62.625 24.105,62.738 42.184,62.792 109.4,62.826 64.838,63.03 110.684,63.026 26.911,63.093 38.252,63.132 62.573,63.25 22.369,63.303 57.612,63.345 59.229,63.332 60.245,63.332 61.387,63.328 100.361,63.391 43.487,63.456 66.494,63.46 24.417,63.491 61.928,63.508 39.948,63.554 42.144,63.563 112.275,63.575 1.572,63.625 2.572,63.625 18.572,63.625 19.572,63.625 20.572,63.625 50.572,63.625 51.572,63.625 52.572,63.625 53.572,63.625 67.572,63.625 68.572,63.625 69.572,63.625 93.572,63.625 94.572,63.625 95.572,63.625 96.693,63.611 118.572,63.625 119.572,63.625 120.572,63.625 28.258,63.629 25.169,63.672 36.914,63.693 98.08,63.76 58.721,63.84 59.737,63.84 108.235,63.873 29.683,63.899 35.482,63.921 31.133,63.933 32.583,63.933 34.033,63.933 110.989,63.95 109.555,63.962 106.525,64.027 99.008,64.045 102.462,64.13 23.392,64.33 25.597,64.334 38.741,64.358 59.229,64.348 60.245,64.348 26.48,64.386 65.392,64.369 100.36,64.416 103.068,64.555 97.795,64.581 2.072,64.625 19.072,64.625 20.072,64.625 21.072,64.625 53.072,64.625 67.072,64.625 68.072,64.625 69.072,64.625 94.072,64.625 95.072,64.625 119.072,64.625 120.072,64.625 121.072,64.625 61.929,64.676 27.342,64.707 57.673,64.847 61.409,64.833 44.497,64.858 58.721,64.856 59.737,64.856 37.403,64.915 43.487,64.906 64.011,64.974 96.27,64.998 26.883,65.004 28.739,65.093 80.456,65.145 90.874,65.165 24.536,65.221 35.982,65.204 30.182,65.237 31.632,65.237 33.082,65.237 34.532,65.237 100.588,65.255 97.71,65.373 28.26,65.458 74.661,65.531 77.701,65.52 88.124,65.531 107.881,65.567 110.746,65.567 75.665,65.584 1.572,65.625 2.572,65.625 19.572,65.625 20.572,65.625 21.572,65.625 22.572,65.625 53.572,65.625 65.572,65.625 66.572,65.625 67.572,65.625 68.572,65.625 93.572,65.625 94.572,65.625 95.572,65.625 119.572,65.625 120.572,65.625 112.463,65.657 45.257,65.665 42.184,65.692 109.592,65.707 29.686,65.72 31.135,65.765 32.585,65.765 34.035,65.765 35.485,65.765 25.796,65.939 58.718,65.988 60.251,65.972 36.899,66.087 98.16,66.166 98.773,66.16 49.868,66.234 82.758,66.24 100.576,66.219 39.619,66.279 44.928,66.365 73.453,66.384 96.154,66.444 27.136,66.492 47.696,66.518 60.077,66.518 58.919,66.534 2.072,66.625 21.072,66.625 63.072,66.625 64.072,66.625 65.072,66.625 66.072,66.625 67.072,66.625 68.072,66.625 94.072,66.625 95.072,66.625 120.072,66.625 121.072,66.625 110.752,66.749 107.887,66.756 109.575,66.771 112.45,66.775 28.535,66.873 97.677,66.891 40.014,66.918 45.502,66.905 72.383,67 38.013,67.016 29.975,67.046 31.425,67.068 32.875,67.068 34.325,67.068 60.192,67.082 35.775,67.095 58.834,67.083 80.265,67.151 83.668,67.15 100.624,67.148 85.153,67.208 86.169,67.208 90.905,67.231 80.858,67.603 1.572,67.625 2.572,67.625 25.572,67.625 26.572,67.625 62.572,67.625 63.572,67.625 64.572,67.625 65.572,67.625 66.572,67.625 67.572,67.625 93.572,67.625 94.572,67.625 95.572,67.625 119.572,67.625 120.572,67.625 84.645,67.716 85.661,67.716 86.677,67.716 98.843,67.785 105.068,67.817 37.007,67.859 111.079,67.865 96.345,67.881 109.581,67.909 112.391,67.914 97.756,67.99 81.415,68.046 70.995,68.063 82.027,68.056 72.343,68.095 89.389,68.083 90.925,68.095 75.357,68.128 87.721,68.164 105.73,68.154 88.569,68.178 100.311,68.175 101.609,68.192 80.335,68.201 85.153,68.224 86.169,68.224 108.235,68.223 58.935,68.237 60.103,68.236 69.498,68.248 74.522,68.234 78.259,68.244 79.39,68.232 82.667,68.248 38.586,68.347 84.213,68.42 44.534,68.514 2.072,68.625 25.072,68.625 26.072,68.625 27.072,68.625 28.072,68.625 29.072,68.625 30.072,68.625 31.072,68.625 32.072,68.625 33.072,68.625 34.072,68.625 35.072,68.625 36.072,68.625 64.072,68.625 65.072,68.625 66.072,68.625 94.072,68.625 95.072,68.625 109.545,68.619 120.072,68.625 121.072,68.625 46.429,68.652 76.177,68.648 76.685,68.648 84.645,68.732 85.661,68.732 86.677,68.732 48.887,68.736 49.39,68.748 60.261,68.757 92.265,68.749 58.756,68.778 42.217,68.875 99.031,68.865 110.85,68.962 67.833,69.034 76.685,69.156 85.153,69.24 86.169,69.24 96.876,69.23 54.901,69.256 37.326,69.274 98.442,69.267 112.109,69.336 93.561,69.399 77.853,69.491 88.632,69.558 46.406,69.588 79.428,69.596 82.764,69.585 100.671,69.58 74.544,69.603 80.314,69.6 1.572,69.625 2.572,69.625 25.572,69.625 26.572,69.625 27.572,69.625 28.572,69.625 29.572,69.625 30.572,69.625 31.572,69.625 32.572,69.625 33.572,69.625 34.572,69.625 35.572,69.625 36.572,69.625 69.415,69.639 107.897,69.633 119.572,69.625 120.572,69.625 76.177,69.664 76.685,69.664 83.684,69.672 87.699,69.655 72.343,69.758 81.143,69.762 82.011,69.771 38.633,69.797 41.903,69.792 70.958,69.779 90.219,69.806 73.416,69.827 48.871,69.9 49.887,69.9 51.029,69.897 66.666,69.895 47.254,69.914 58.759,69.92 59.775,69.92 61.4,69.915 62.821,69.988 63.77,70.001 65.22,70.001 109.187,70.024 46.708,70.08 51.57,70.076 61.945,70.088 84.673,70.146 85.659,70.144 94.812,70.132 77.491,70.176 87.171,70.165 110.06,70.178 99.53,70.227 92.098,70.24 54.879,70.28 111.668,70.26 101.906,70.34 105.809,70.34 106.64,70.355 44.507,70.382 48.363,70.408 49.379,70.408 102.863,70.405 57.607,70.417 59.267,70.428 60.283,70.428 97.706,70.419 42.127,70.546 92.965,70.605 2.072,70.625 34.072,70.625 35.072,70.625 36.072,70.625 119.072,70.625 120.072,70.625 121.072,70.625 86.417,70.653 37.47,70.717 40.006,70.753 109.104,70.772 48.871,70.916 49.887,70.916 58.759,70.936 59.775,70.936 96.014,70.942 67.496,70.969 111.127,71.021 108.238,71.12 39.218,71.124 94.018,71.181 41.953,71.214 46.691,71.236 51.571,71.244 61.961,71.246 63.353,71.305 64.803,71.305 66.086,71.306 98.79,71.382 47.315,71.415 48.363,71.424 49.379,71.424 51.05,71.401 59.267,71.444 60.283,71.444 61.415,71.448 1.572,71.625 2.572,71.625 119.572,71.625 120.572,71.625 40.57,71.648 110.203,71.732 97.152,71.842 38.208,71.965 95.223,71.988 100.068,72.066 109.069,72.256 103.404,72.319 101.246,72.436 60.274,72.493 102.326,72.478 105.772,72.483 107.637,72.486 49.893,72.54 48.359,72.556 58.773,72.553 42.606,72.591 2.072,72.625 94.072,72.625 95.072,72.625 118.072,72.625 119.072,72.625 120.072,72.625 121.072,72.625 39.239,72.737 104.673,72.756 87.953,72.788 98.22,72.823 76.181,72.851 96.361,72.887 41.743,72.9 40.042,72.934 40.833,72.982 48.561,73.102 49.719,73.086 58.939,73.099 60.096,73.116 103.275,73.138 87.517,73.463 34.024,73.504 1.572,73.625 2.572,73.625 93.572,73.625 94.572,73.625 95.572,73.625 117.572,73.625 118.572,73.625 119.572,73.625 120.572,73.625 99.382,73.689 55.304,73.749 25.884,73.811 26.916,73.798 58.503,73.811 21.825,73.854 22.844,73.875 29.453,73.883 97.418,73.878 100.759,74.142 102.209,74.122 104.241,74.14 50.707,74.172 79.347,74.259 51.45,74.308 53.904,74.359 57.711,74.348 54.812,74.382 56.262,74.382 59.711,74.454 18.006,74.565 2.072,74.625 72.668,74.601 93.072,74.625 94.072,74.625 95.072,74.625 116.072,74.625 117.072,74.625 118.072,74.625 119.072,74.625 120.072,74.625 121.072,74.625 49.171,74.695 98.576,74.752 82.464,74.784 103.182,75.131 73.339,75.14 49.732,75.209 99.916,75.305 58.618,75.408 101.777,75.489 1.572,75.625 2.572,75.625 92.572,75.625 115.572,75.625 116.572,75.625 117.572,75.625 118.572,75.625 119.572,75.625 120.572,75.625 52.845,75.685 54.295,75.685 55.745,75.685 57.195,75.685 71.639,75.835 80.605,76.07 81.113,76.07 81.621,76.07 66.592,76.094 85.252,76.266 80.605,76.578 81.113,76.578 81.621,76.578 63.444,76.6 2.072,76.625 47.072,76.625 48.072,76.625 49.072,76.625 50.072,76.625 51.072,76.625 52.072,76.625 53.072,76.625 54.072,76.625 55.072,76.625 56.072,76.625 57.072,76.625 58.072,76.625 59.072,76.625 60.072,76.625 67.23,76.631 87.072,76.625 88.072,76.625 89.072,76.625 90.072,76.625 91.072,76.625 92.072,76.625 97.072,76.625 98.072,76.625 99.072,76.625 100.072,76.625 101.072,76.625 114.072,76.625 115.072,76.625 116.072,76.625 117.072,76.625 121.072,76.625 76.07,76.783 109.929,76.761 77.851,76.935 63.803,77.05 80.605,77.086 81.113,77.086 81.621,77.086 66.58,77.179 47.627,77.292 48.627,77.292 49.627,77.292 50.627,77.292 51.627,77.292 52.627,77.292 53.627,77.292 54.627,77.292 55.627,77.292 56.627,77.292 57.627,77.292 58.627,77.292 109.263,77.427 79.632,77.491 78.748,77.592 80.605,77.594 81.113,77.594 81.621,77.594 76.999,77.604 1.572,77.625 2.572,77.625 59.572,77.625 60.572,77.625 61.572,77.625 86.572,77.625 87.572,77.625 88.572,77.625 89.572,77.625 90.572,77.625 91.572,77.625 92.572,77.625 96.572,77.625 97.572,77.625 98.572,77.625 99.572,77.625 113.572,77.625 114.572,77.625 115.572,77.625 116.572,77.625 76.045,77.818 102.977,78.023 103.977,78.023 104.977,78.023 108.61,78.055 79.649,78.109 77.86,78.201 2.072,78.625 87.072,78.625 88.072,78.625 89.072,78.625 90.072,78.625 91.072,78.625 92.072,78.625 93.072,78.625 96.072,78.625 97.072,78.625 98.072,78.625 99.072,78.625 112.072,78.625 113.072,78.625 114.072,78.625 115.072,78.625 116.072,78.625 117.072,78.625 121.072,78.625 108.021,78.721 42.106,78.902 23.327,78.941 34.591,78.974 25.397,79.362 1.572,79.625 2.572,79.625 60.572,79.625 61.572,79.625 62.572,79.625 63.572,79.625 114.572,79.625 115.572,79.625 116.572,79.625 117.572,79.625 118.572,79.625 119.572,79.625 120.572,79.625 76.335,79.978 75.24,79.999 72.314,80.076 32.282,80.372 75.806,80.496 2.072,80.625 73.072,80.625 116.072,80.625 117.072,80.625 118.072,80.625 119.072,80.625 120.072,80.625 121.072,80.625 79.938,80.743 80.938,80.743 81.938,80.743 82.938,80.743 83.938,80.743 84.938,80.743 85.938,80.743 86.938,80.743 18.09,81.112 66.017,81.109 62.021,81.138 63.021,81.138 64.021,81.138 65.021,81.138 1.572,81.625 2.572,81.625 117.572,81.625 118.572,81.625 119.572,81.625 120.572,81.625 71.849,81.756 74.399,82.025 48.303,82.445 2.072,82.625 56.196,82.611 118.072,82.625 119.072,82.625 120.072,82.625 121.072,82.625 18.107,82.657 30.031,83.241 34.413,83.268 40.644,83.438 115.288,83.52 37.338,83.566 37.846,83.566 35.276,83.572 35.784,83.572 36.292,83.572 36.8,83.572 1.572,83.625 2.572,83.625